# Altium PCB PCB1.PcbDoc
Units mil, origin at the board's own origin, x right, y up, seen from the top; angles counter-clockwise.
Board outline 6000 x 4000 mil, 2 copper layers (Top Layer, Bottom Layer); 25 components, 42 nets, 170 pads, 0 vias.
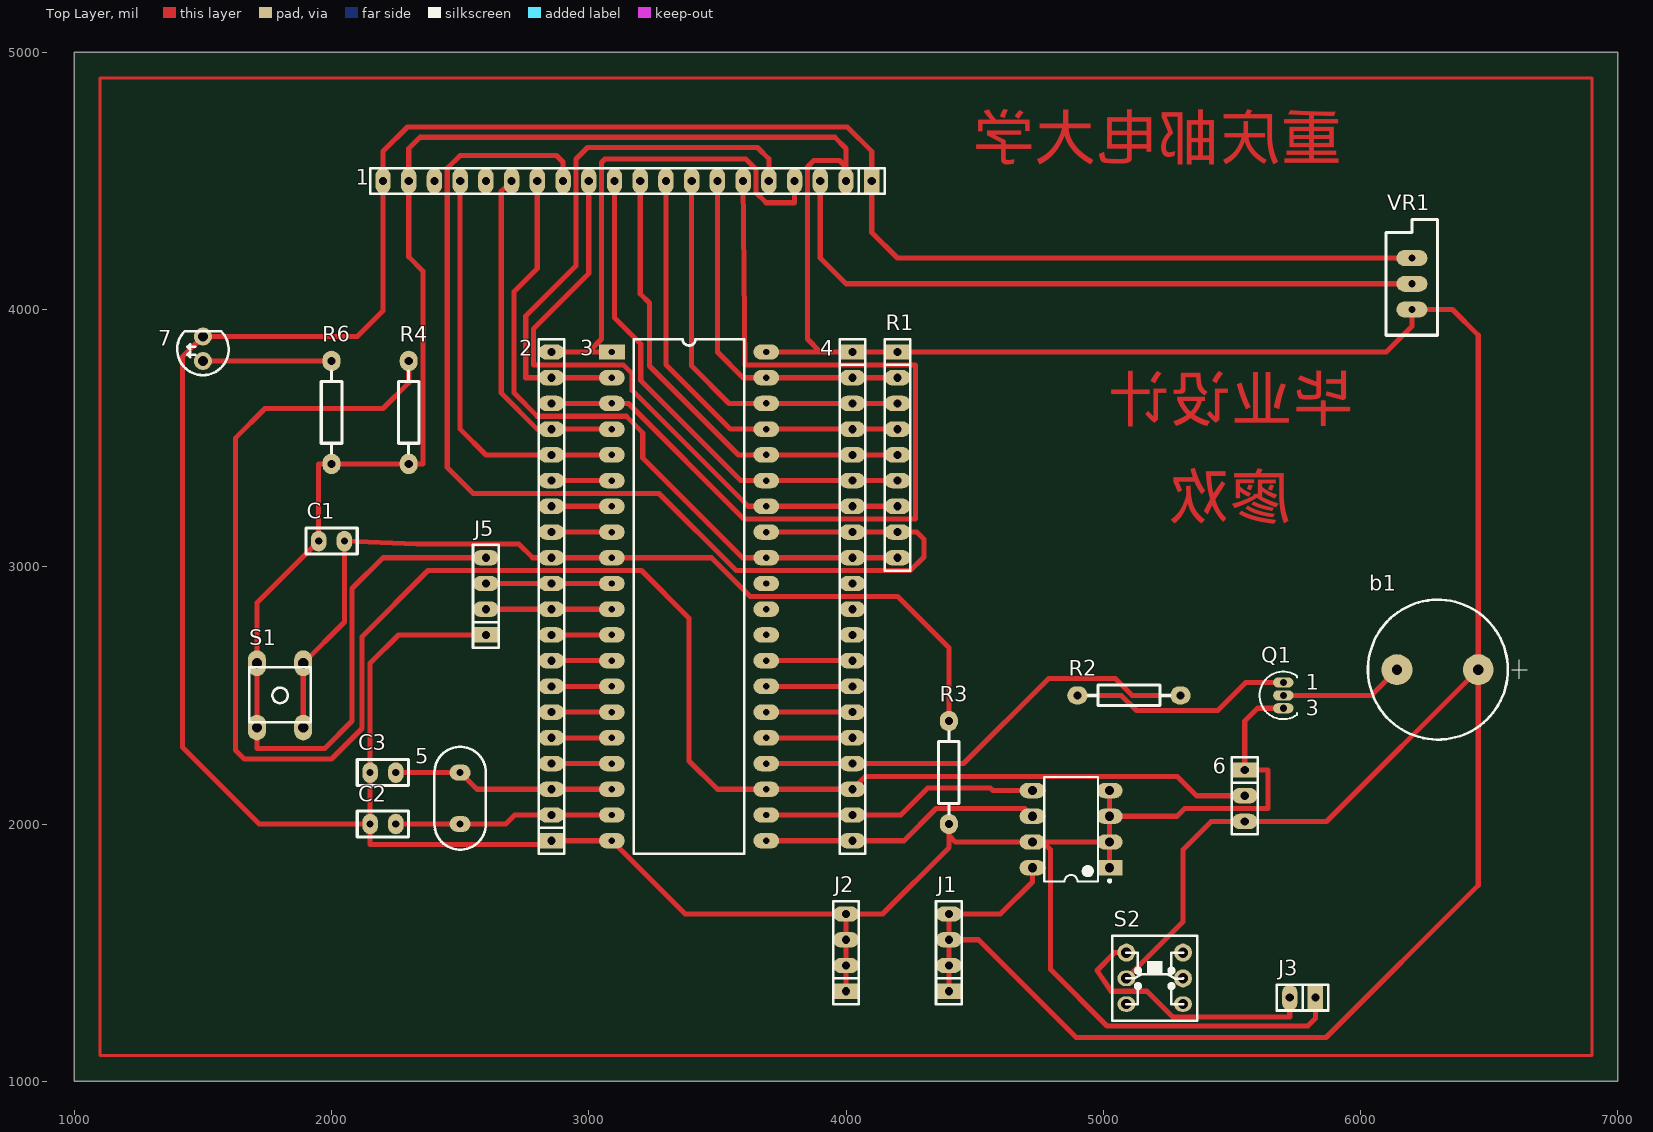
[diagram p0: Top Layer view]
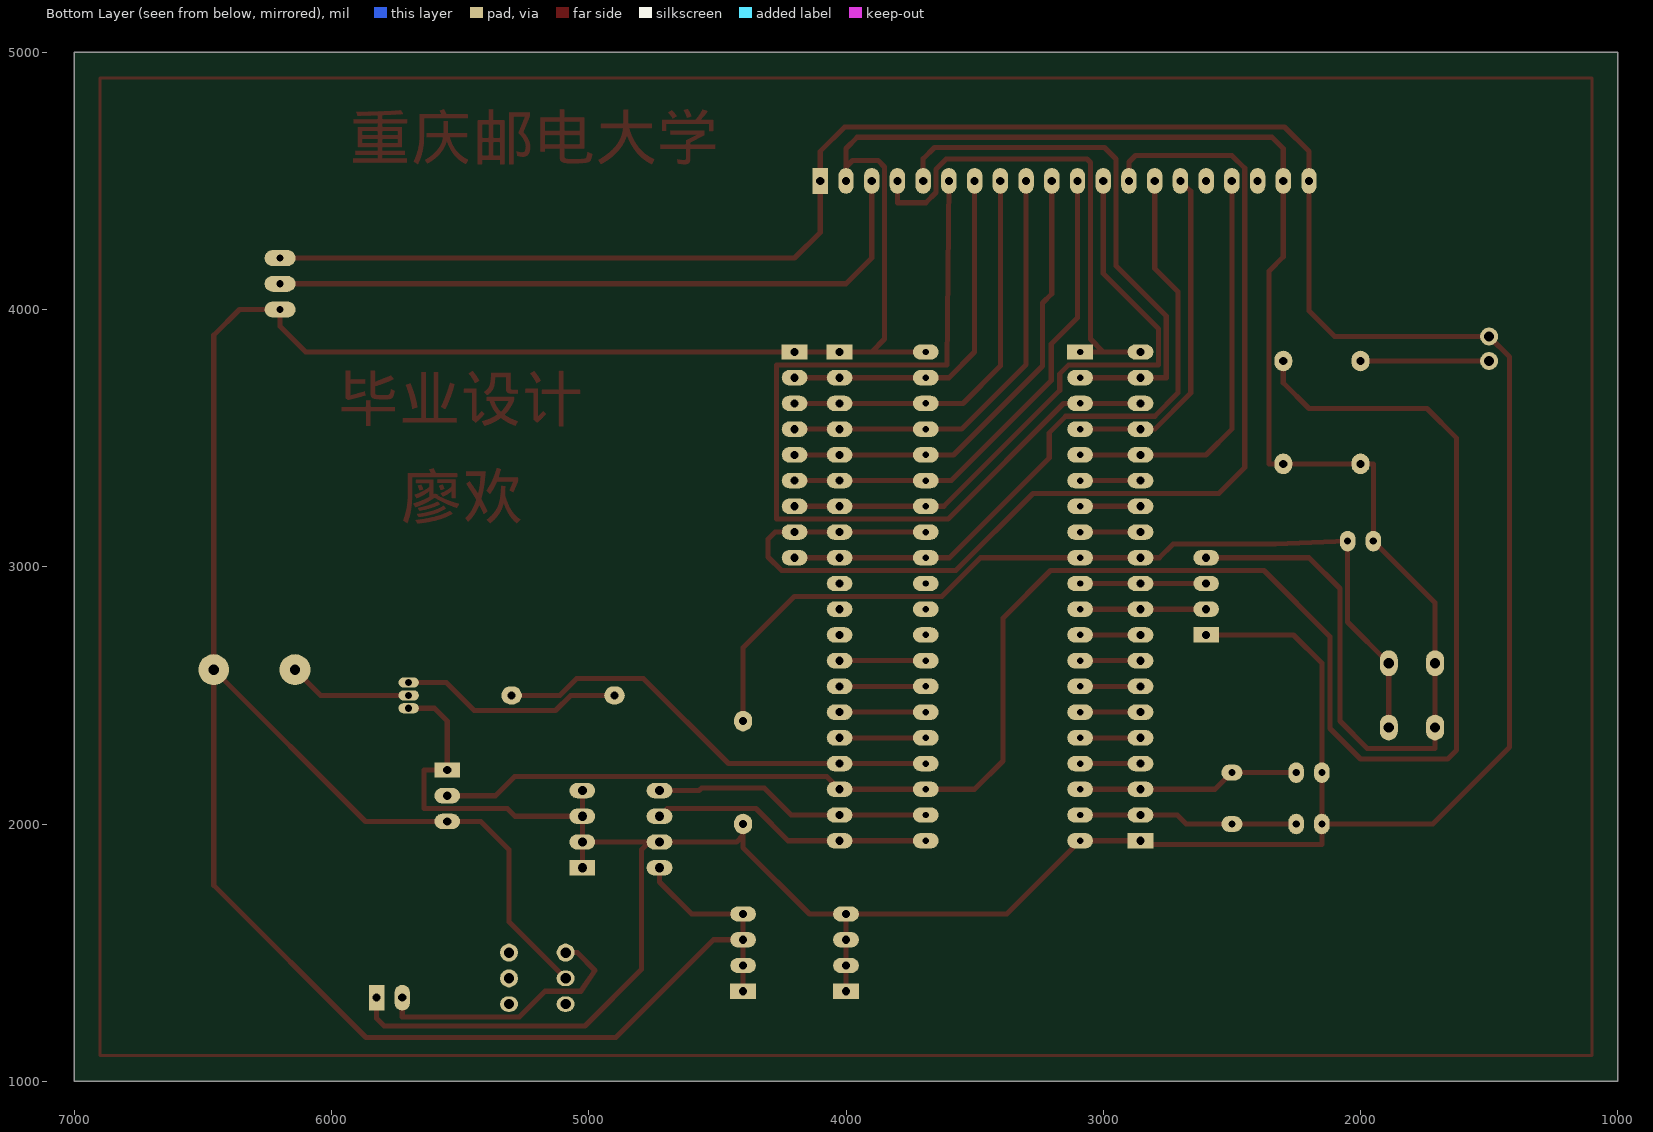
[diagram p1: Bottom Layer view, seen from below]

## Layer stack, top to bottom
Top Solder: solder mask 0.4, Solder Resist, Dk 3.5
Top Layer: signal copper 1.4
Dielectric 1: dielectric 12.6, FR-4, Dk 4.8
Bottom Layer: signal copper 1.4
Bottom Solder: solder mask 0.4, Solder Resist, Dk 3.5

## Board outline
1000,1000 7000,1000 7000,5000 1000,5000

## Design rules (kind name [scope] priority, off if disabled: settings)
Clearance [All] p1: gap=10
PolygonConnect [All] p1: connectstyle=Relief reliefconductorwidth=10 reliefentries=4 polygonreliefangle="90 Angle" airgapwidth=10
RoutingLayers [All] p1: top layer_v5=TRUE bottom layer_v5=FALSE
RoutingVias [All] p1: holewidth=28 width=50 viastyle="Through Hole" minholewidth=28 minwidth=50 maxholewidth=28 maxwidth=50
SolderMaskExpansion [All] p1: expansion=4
UnpouredPolygon [All] p1: allowunpoured=FALSE
Width [All] p1: maxlimit=20 minlimit=20 preferedwidth=20
28 further rules are at their usual default settings.

## Components (designator, comment, footprint, x,y, rotation, side; value= is the part's Value field where it differs from the comment)
1 "CON20" SIP20 4100,4500 r180 top
2 "CON20" SIP20 2855,1935 r90 top
3 "89C51" DIP40 3090,3835 r0 top
4 "CON20" SIP20 4025,3835 r270 top
5 "11.0592M" XTAL 2500,2100 r270 top
6 "CON3" SIP3 5550,2110 r270 top
7 "LED" LED 1500,3800 r90 top
b1 "BELL" bell 6300,2600 r0 top
C1 "10u" RAD0.1 2000,3100 r0 top
C2 "" RAD0.1 2200,2000 r0 top
C3 "" RAD0.1 2200,2200 r0 top
J1 "CON4" SIP4 4400,1500 r90 top
J2 "CON4" SIP4 4000,1500 r90 top
J3 "CON2" SIP2 5775,1325 r180 top
J5 "CON4" SIP4 2600,2885 r90 top
Q1 "PNP" TO-92 5700,2500 r0 top
R1 "RES10" SIP9 4200,3835 r270 top
R2 "RES" AXIAL0.4 5100,2500 r180 top
R3 "RES" AXIAL0.4 4400,2200 r90 top
R4 "RES" AXIAL0.4 2300,3600 r90 top
R6 "1K" AXIAL0.4 2000,3600 r90 top
S1 "" AN66 1800,2500 r180 top
S2 "双刀单柄开关" AN88 5200,1400 r0 top
VR1 "VR" VR3296 6200,4100 r90 top
? "8PIN" DIP-8 4875,1980 r180 top

## Footprints (in the part's own frame and the unit in brackets; to place one, negate y for a bottom-side part, rotate by r counter-clockwise, add the part's x,y. Pads: shape width x height; smd on the part's side, far side on the other; paste and mask are expansions set on the pad)
AN66 [mil]
  oval 70x100 hole 40: 1(-90,125) 1(-90,-125) 2(90,125) 2(90,-125)
  silkscreen extent -120,-110 120,105
AN88 [mil]
  round 70 hole 40: 1(-110,100) 5(110,0) 6(110,100)
  oval 70x60 hole 40: 2(-110,0) 3(-110,-100) 4(110,-100)
  silkscreen extent -165,-165 165,165
AXIAL0.4 [mil]
  oval 80x70 hole 32: 1(-200,0) 2(200,0)
  silkscreen extent -160,-40 160,40
bell [mil]
  round 120 hole 40: 1(158,0) 2(-158,0)
  silkscreen extent -271,-272 348,272
DIP40 [mil]
  rect 100x60 hole 25: 1(0,0)
  oval 100x60 hole 25: 2(0,-100) 3(0,-200) 4(0,-300) 5(0,-400) 6(0,-500) 7(0,-600) 8(0,-700) 9(0,-800) 10(0,-900) 11(0,-1000) 12(0,-1100) 13(0,-1200) 14(0,-1300) 15(0,-1400) 16(0,-1500) 17(0,-1600) 18(0,-1700) 19(0,-1800) 20(0,-1900) 21(600,-1900) 22(600,-1800) 23(600,-1700) 24(600,-1600) 25(600,-1500) 26(600,-1400) 27(600,-1300) 28(600,-1200) 29(600,-1100) 30(600,-1000) 31(600,-900) 32(600,-800) 33(600,-700) 34(600,-600) 35(600,-500) 36(600,-400) 37(600,-300) 38(600,-200) 39(600,-100) 40(600,0)
  silkscreen extent 85,-1950 515,50
DIP-8 [mil] "DIP; 8 Leads; Row Spacing 7.62 mm; Pitch 2.54 mm"
  rect 100x60 hole 35.43: 1(-150,150)
  oval 100x60 hole 35.43: 2(-150,50) 3(-150,-50) 4(-150,-150) 5(150,-150) 6(150,-50) 7(150,50) 8(150,150)
  silkscreen extent -155,-203 104,206, body extent -142,-203 142,203, height 200
LED [mil]
  round 70 hole 40: 1(0,0) 2(95,0)
  silkscreen extent -55,-100 116,100
RAD0.1 [mil]
  oval 60x80 hole 28: 1(-50,0) 2(50,0)
  silkscreen extent -100,-50 100,50
SIP2 [mil]
  rect 60x100 hole 32: 1(-50,0)
  oval 60x100 hole 32: 2(50,0)
  silkscreen extent -100,-50 100,50
SIP3 [mil]
  rect 60x100 hole 32: 1(-100,0)
  oval 60x100 hole 32: 2(0,0) 3(100,0)
  silkscreen extent -150,-50 150,50
SIP4 [mil]
  rect 60x100 hole 32: 1(-150,0)
  oval 60x100 hole 32: 2(-50,0) 3(50,0) 4(150,0)
  silkscreen extent -200,-50 200,50
SIP9 [mil]
  rect 60x100 hole 32: 1(0,0)
  oval 60x100 hole 32: 2(100,0) 3(200,0) 4(300,0) 5(400,0) 6(500,0) 7(600,0) 8(700,0) 9(800,0)
  silkscreen extent -50,-50 850,50
SIP20 [mil]
  rect 60x100 hole 32: 1(0,0)
  oval 60x100 hole 32: 2(100,0) 3(200,0) 4(300,0) 5(400,0) 6(500,0) 7(600,0) 8(700,0) 9(800,0) 10(900,0) 11(1000,0) 12(1100,0) 13(1200,0) 14(1300,0) 15(1400,0) 16(1500,0) 17(1600,0) 18(1700,0) 19(1800,0) 20(1900,0)
  silkscreen extent -50,-50 1950,50
TO-92 [mm] "TO, Flat Index; 3 In-Line, Axial Leads; Body Dia. 4.6mm; Leads 0.41 x 0.39 mm (max)"
  oval 2x1 hole 0.7: 1(0,1.27) 2(0,0) 3(0,-1.27)
  silkscreen extent -2.34,-2.34 1.35,2.34
VR3296 [mil]
  oval 62x120 hole 28: 1(-100,0) 2(100,0) W(0,0)
  silkscreen extent -200,-100 250,100
XTAL [mil]
  oval 62x82 hole 28: 1(-100,0) 2(100,0)
  silkscreen extent -200,-100 200,100

## Part data
5: library part CRYSTAL
C1: library part CAP
C2 C3: library part Cap, "Capacitor"
J1 J2: "Connector"
R6: library part RES
S1: library part 微动开关

## Nets (pads, with @x,y where several pads share a name; then routed paths per layer and width w, separated by ;. In a path a pad name is that pad's centre, name@x,y a point inside that pad or via, vN(x,y) a via of type N, cw(c..) or ccw(c..) an arc to the next point about the centre after c; other vN are vias at no path point)
18B20: 3.23 4.18 6.2 R4.2 | length 7239.9
  Top Layer w20: R4.2 2300,3715 2200,3615 1741,3615 1626,3500 1626,2288 1661,2253 2000,2253 2118,2371 2118,2728 2375,2985 3205,2985 3390,2800 3390,2245 3500,2135 3.23 4.18 4075,2185 5288,2185 5363,2110 6.2
BEEP: 3.24 4.17 R2.1 | length 1773.6
  Top Layer w20: 3.24 4.17 4457,2235 4787,2565 5048,2565 5113,2500 R2.1
D0: 1.7 3.39 4.2 R1.2 | length 1406.4
  Top Layer w20: 1.7 3500,3835 3600,3735 3.39 4.2 R1.2
D1: 1.8 3.38 4.3 R1.3 | length 1580.1
  Top Layer w20: 1.8 3400,3780 3545,3635 3.38 4.3 R1.3
D2: 1.9 3.37 4.4 R1.4 | length 1718.2
  Top Layer w20: 1.9 3300,3785.64 3550.64,3535 3.37 4.4 R1.4
D3: 1.10 3.36 4.5 R1.5 | length 1841.4
  Top Layer w20: 1.10 3200,4061.33 3236.33,4025 3236.33,3780.4 3581.73,3435 3.36 4.5 R1.5
D4: 1.11 3.35 4.6 R1.6 | length 1977.6
  Top Layer w20: 1.11 3100,3968 3202,3866 3202,3723.56 3590.56,3335 3.35 4.6 R1.6
D5: 1.12 3.34 4.7 R1.7 | length 2484.4
  Top Layer w20: 1.12 3000,4140 2785,3925 2785,3785 3134,3785 3169,3750 3169,3686 3620,3235 3.34 4.7 R1.7
D6: 1.13 3.33 4.8 R1.8 | length 4452.7
  Top Layer w20: 1.13 2900,4574 2875,4599 2500,4599 2450,4549 2450,3386 2551,3285 3273,3285 3573,2985 4250,2985 4303,3038 4303,3107 4275,3135 R1.8 4.8 3.33
D7: 1.14 3.32 4.9 R1.9 | length 2674.6
  Top Layer w20: 1.14 2800,4160 2710,4070 2710,3675 2800,3585 3145.66,3585 3210,3520.66 3210,3423 3598,3035 3.32 4.9 R1.9
GND: 1.1 1.20 2.1 3.20 6.1 7.2 ?.1 ?.2 ?.3 ?.4 ?.7 C2.1 C3.1 J2.1 J2.2 J2.3 J2.4 J3.1 J5.1 Q1.3 R3.1 VR1.2 | length 16237.7
  Top Layer w20: J5.1 2260,2735 2150,2625 C3.1 C2.1 ; J2.1 J2.2 J2.3 J2.4 ; R3.1 4400,1955 ; ?.1 ?.2 ; ?.4 ?.3 ; Q1.3 5600,2450 5550,2400 6.1 5640,2210 5640,2060 5317,2060 5287,2030 ?.3 ; J3.1 5825,1245 5795,1215 5015,1215 4795,1435 4795,1900 ?.7@4765,1930 ; VR1.2 4200,4200 4100,4300 1.1 4100,4615 4005,4710 2295,4710 2200,4615 1.20 2200,3995 2100,3895 7.2 1420,3815 1420,2299 1719,2000 C2.1 ; C2.1 2150,1920 2840,1920 2.1 3.20 3375,1650 J2.4 ; J2.4 4142,1650 4400,1908 4400,1955 ; 4400,1955 4425,1930 ?.7 ?.7@4765,1930 ; ?.7@4765,1930 ?.2 ; ?.2 ?.3
Net1_3: 1.3 VR1.W | length 2641.4
  Top Layer w20: 1.3 3900,4200 4000,4100 VR1.W
Net2_8: 2.8 3.13 | length 235
  Top Layer w20: 2.8 3.13
Net2_9: 2.9 3.12 | length 235
  Top Layer w20: 2.9 3.12
Net2_13: 2.13 3.8 | length 235
  Top Layer w20: 2.13 3.8
Net2_14: 2.14 3.7 | length 235
  Top Layer w20: 2.14 3.7
Net2_15: 2.15 3.6 | length 235
  Top Layer w20: 2.15 3.6
Net3_25: 3.25 4.16 | length 335
  Top Layer w20: 3.25 4.16
Net3_26: 3.26 4.15 | length 335
  Top Layer w20: 3.26 4.15
Net3_27: 3.27 4.14 | length 335
  Top Layer w20: 3.27 4.14
Net3_28: 3.28 4.13 | length 335
  Top Layer w20: 3.28 4.13
Net7_A: 7.1 R6.2 | length 500
  Top Layer w20: 7.1 R6.2
Netb1_2: b1.2 Q1.2 | length 483.4
  Top Layer w20: Q1.2 6042,2500 b1.2
NetJ3_2: J3.2 S2.1 | length 1051.5
  Top Layer w20: S2.1 5045,1500 4975.41,1430.41 5031.25,1350 5170,1350 5270,1250 5725,1250 J3.2
NetQ1_1: Q1.1 R2.2 | length 869.6
  Top Layer w20: R2.2 5070,2500 5129,2441 5445,2441 5554,2550 Q1.1
P10: 1.4 2.20 3.1 | length 1956.2
  Top Layer w20: 2.20 3000,3835 ; 3.1 3000,3835 ; 1.4 3800,4415 3690,4415 3650,4455 3650,4545 3610,4585 3063,4585 3050,4572 3050,3885 3000,3835
P11: 1.5 2.19 3.2 | length 2138.6
  Top Layer w20: 3.2 2.19 2755,3735 2755,3975 2950,4170 2950,4585 2995,4630 3656,4630 3700,4586 1.5
P12: 1.6 2.18 3.3 | length 3579.4
  Top Layer w20: 2.18 3.3 3154,3635 3604,3185 4270,3185 4270,3785 3607,3785 1.6
P13: 1.15 2.17 3.4 | length 1329.6
  Top Layer w20: 1.15 2660,4460 2660,3675 2800,3535 2.17 3.4
P14: 1.17 2.16 3.5 | length 1596.4
  Top Layer w20: 1.17 2500,3535 2600,3435 2.16 3.5
P20: 3.21 4.20 ?.6 | length 1099.2
  Top Layer w20: 3.21 4.20 4225,1935 4350,2060 4695,2060 ?.6
P21: 3.22 4.19 ?.5 | length 1082.6
  Top Layer w20: 3.22 4.19 4213,2035 4318,2140 4561,2140 4571,2130 ?.5
P30: 2.11 3.10 J5.3 | length 490
  Top Layer w20: J5.3 2.11 3.10
P31: 2.10 3.11 J5.2 | length 490
  Top Layer w20: J5.2 2.10 3.11
P34: 2.7 3.14 | length 235
  Top Layer w20: 2.7 3.14
P35: 2.6 3.15 | length 235
  Top Layer w20: 2.6 3.15
P36: 2.5 3.16 | length 235
  Top Layer w20: 2.5 3.16
P37: 2.4 3.17 | length 235
  Top Layer w20: 2.4 3.17
RST: 2.12 3.9 C1.2 R3.2 S1.1 | length 3593.8
  Top Layer w20: S1.1@1890,2375 1890,2625 2050,2785 C1.2 2330,3089 2728,3089 2782,3035 2.12 3.9 3477,3035 3627,2885 4200,2885 4400,2685 R3.2
VCC: 1.2 1.19 3.40 4.1 6.3 ?.8 b1.1 C1.1 J1.1 J1.2 J1.3 J1.4 J5.4 R1.1 R4.1 R6.1 S1.2 S2.2 VR1.1 | length 17406
  Top Layer w20: J5.4 2200,3035 2080,2915 2080,2400 1974,2294 1710,2294 1710,2375 1710,2625 1710,2860 C1.1 1950,3400 R6.1 R4.1 2355,3400 2355,4150 2300,4205 1.19 2300,4626 2344,4670 3956,4670 4000,4626 4000,4554 ; 3.40 3900,3835 ; 1.2 4000,4554 ; J1.1 J1.2 J1.3 ; ?.8 4725,1775 4600,1650 J1.4 J1.3 ; S2.2 5310,1620 5310,1900 5420,2010 6.3 5868,2010 b1.1 ; 3900,3835 4.1 R1.1 6100,3835 6200,3935 VR1.1 6358,4000 6458,3900 b1.1 ; 3900,3835 3850,3885 3850,4554 3875,4579 3975,4579 4000,4554 ; J1.3 4515,1550 4895,1170 5866,1170 6458,1762 b1.1
X1: 2.2 3.19 5.2 C2.2 | length 854.5
  Top Layer w20: C2.2 5.2 2677,2000 2712,2035 2.2 3.19
X2: 2.3 3.18 5.1 C3.2 | length 866.9
  Top Layer w20: C3.2 5.1 2565,2135 2.3 3.18
pads on no net: 1.16 1.18 3.29 3.30 3.31 4.10 4.11 4.12 S2.3 S2.4 S2.5 S2.6
copper on no net: | length 19200
  Top Layer w10: 1100,1100 1100,4900 6900,4900 6900,1100 1100,1100

## Other copper
Top Layer:
  text "重庆邮电大学" at 5930,4525 h300
  text "毕业设计" at 5975,3510 h300
  text "廖欢" at 5730,3130 h300

## Text inside footprints (layer, text, board x,y; h text height)
Q1: Top Overlay "1" at 5787.56,2522.05 h59.05; Top Overlay "3" at 5787.56,2419.88 h59.05